# Altium PCB VCU_DV.PcbDoc
Units mm, origin at the board's own origin, x right, y up, seen from the top; angles counter-clockwise.
Board outline 85 x 79.85 mm, 2 copper layers (Top Layer, Bottom Layer); 24 components, 41 nets, 239 pads, 16 vias.
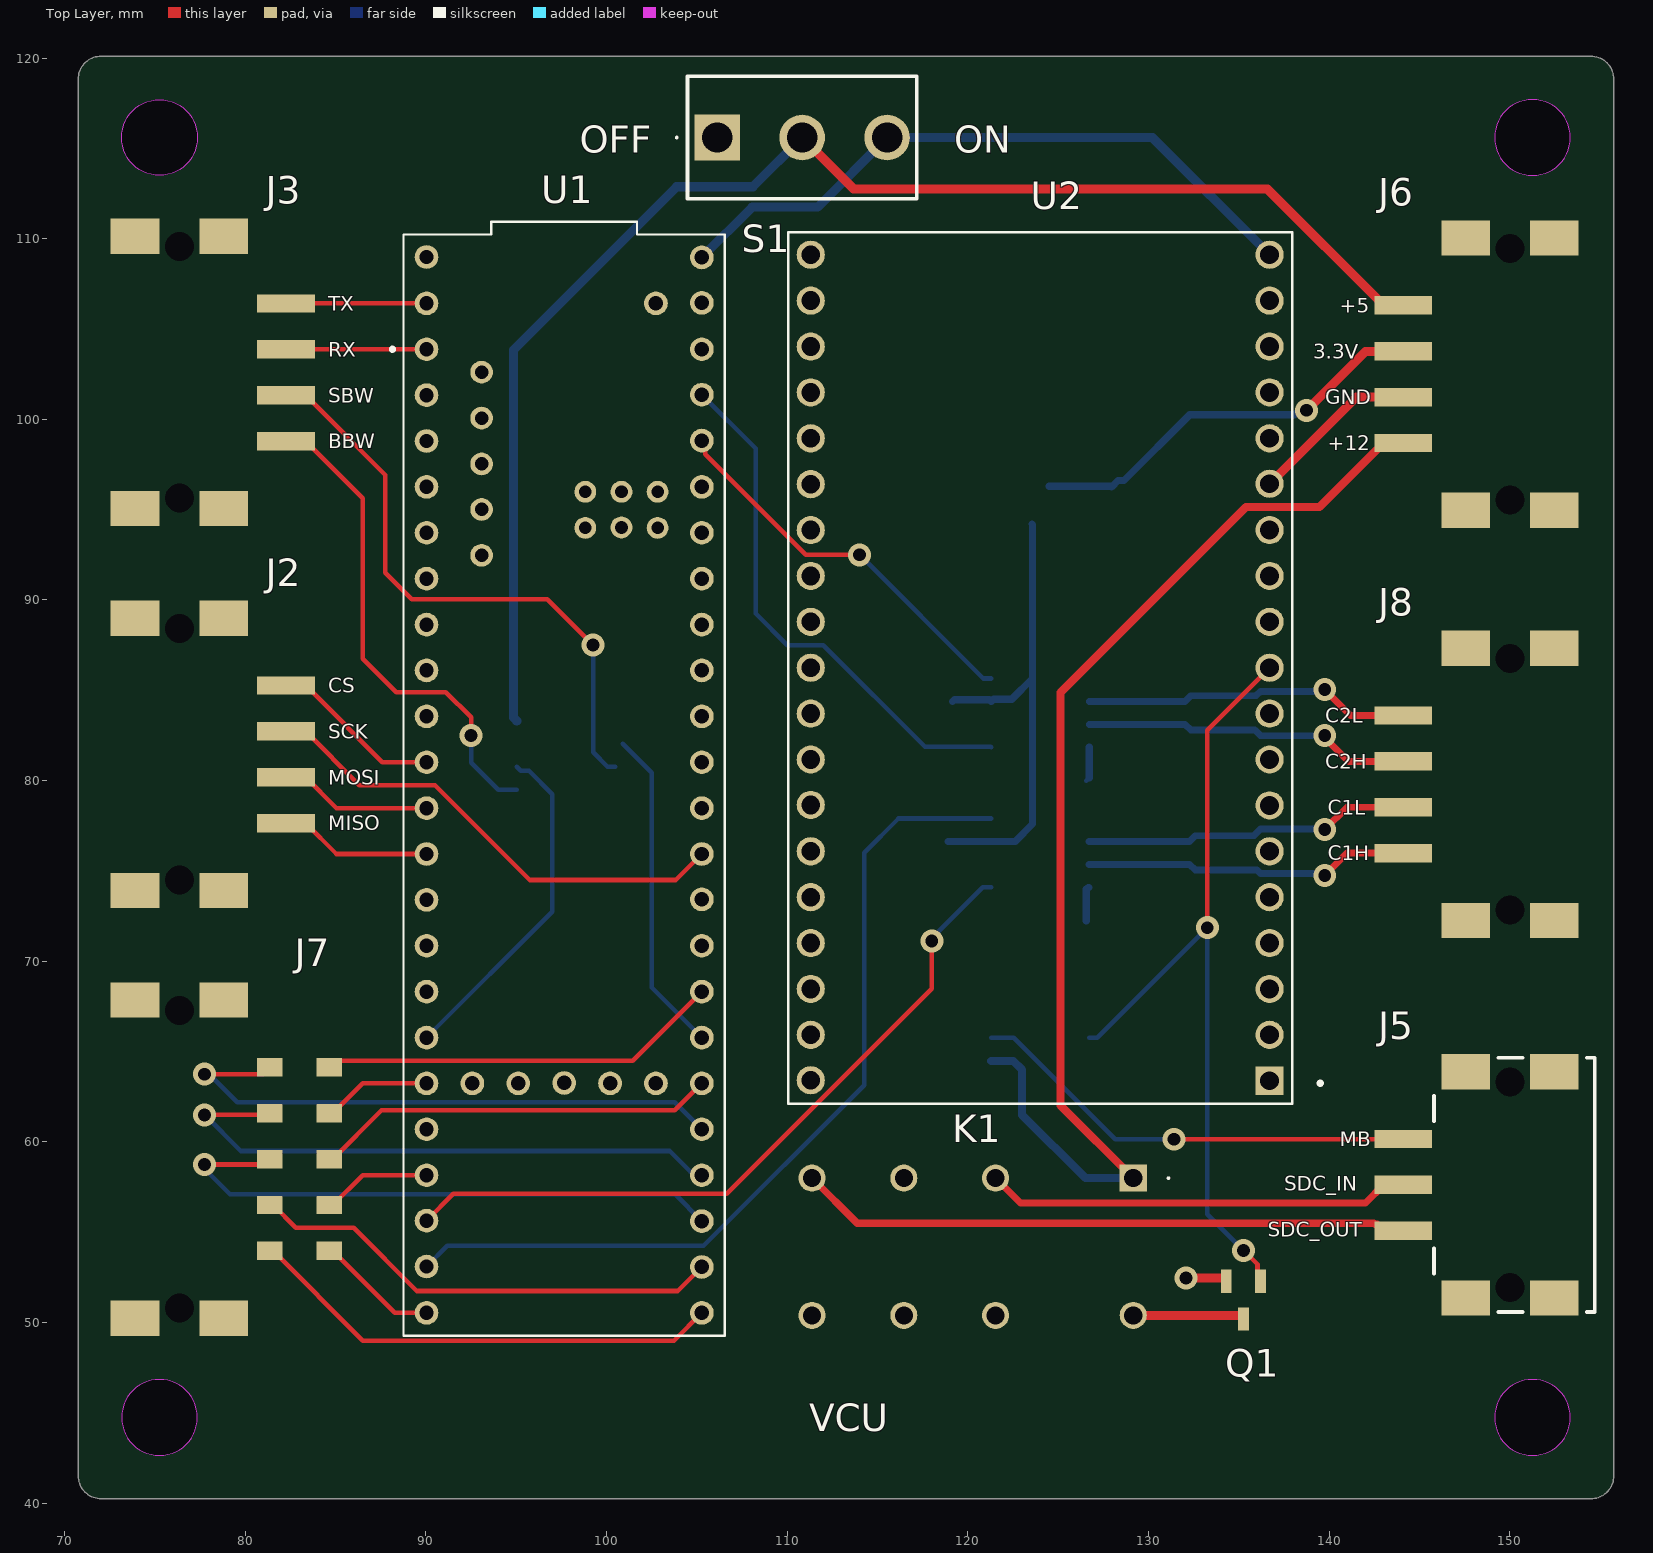
[diagram p0: Top Layer view]
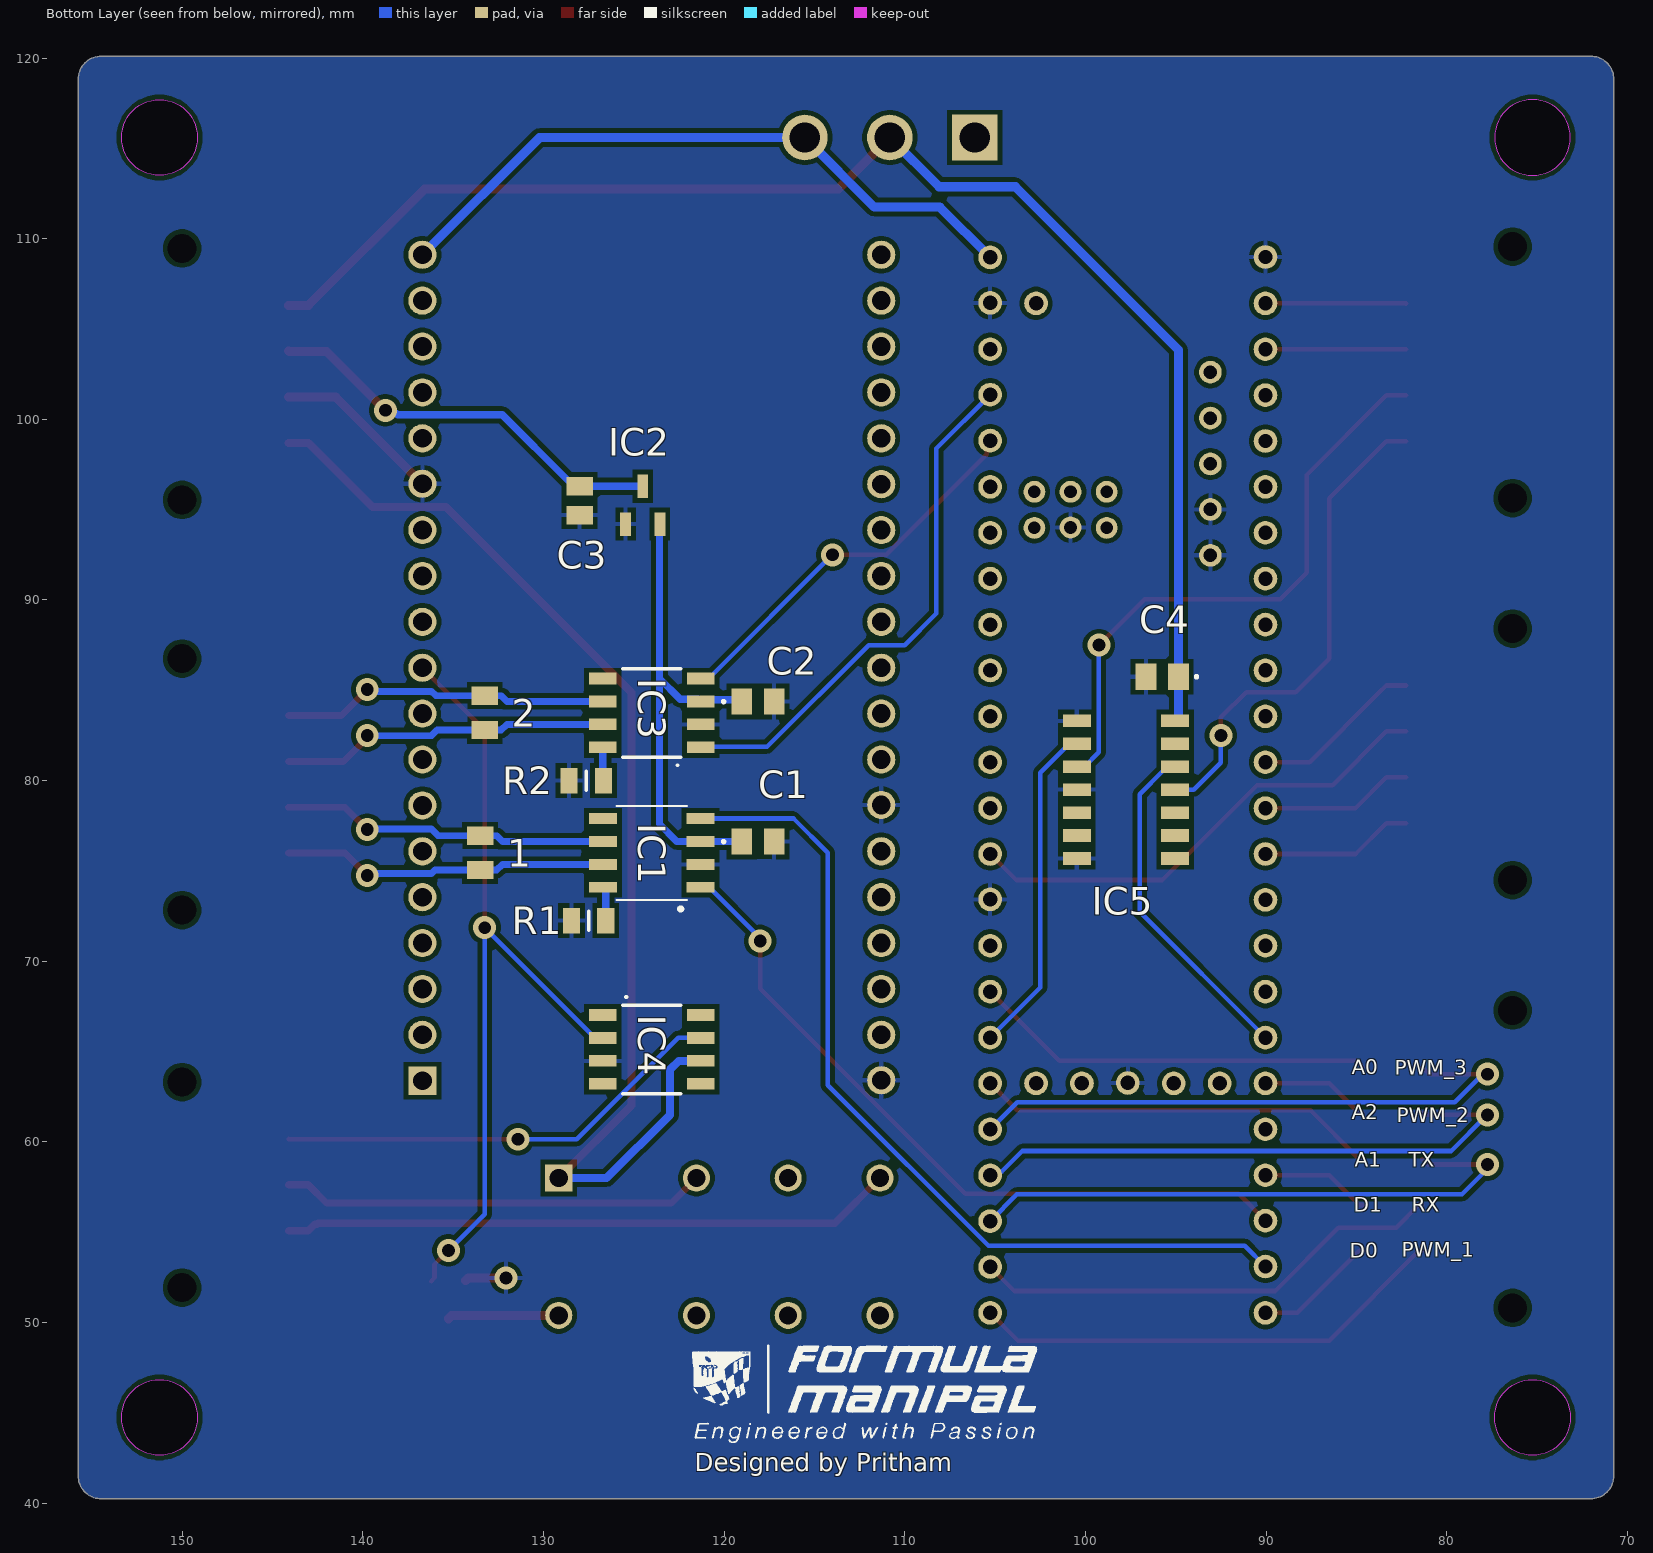
[diagram p1: Bottom Layer view, seen from below]
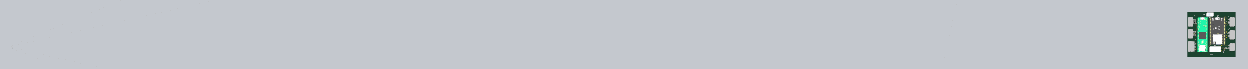
[diagram p2: 3D render of the assembled board from above, using the file's embedded part models]
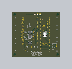
[diagram p3: 3D render of the assembled board from below, using the file's embedded part models]

## Layer stack, top to bottom
Top Solder: solder mask 0.0102, Solder Resist, Dk 3.5
Top Layer: signal copper 0.0356
Dielectric 1: dielectric 0.32, FR-4, Dk 4.8
Bottom Layer: signal copper 0.0356
Bottom Solder: solder mask 0.0102, Solder Resist, Dk 3.5

## Board outline
70.75,113.73 70.75,118.9 70.75,118.83 cw(c72.02,118.83) 72.02,120.1 154.48,120.1 cw(c154.48,118.83) 155.75,118.83 155.75,113.73 155.75,41.5 155.75,41.52 cw(c154.48,41.52) 154.48,40.25 72.02,40.25 cw(c72.02,41.52) 70.75,41.52 70.75,41.5
cut-out: 149.15,44.75 ccw(c151.25,44.75) 151.25,42.65 ccw(c151.25,44.75) 153.35,44.75 ccw(c151.25,44.75) 151.25,46.85 ccw(c151.25,44.75)
cut-out: 73.15,44.75 ccw(c75.25,44.75) 75.25,42.65 ccw(c75.25,44.75) 77.35,44.75 ccw(c75.25,44.75) 75.25,46.85 ccw(c75.25,44.75)
cut-out: 149.15,115.6 ccw(c151.25,115.6) 151.25,113.5 ccw(c151.25,115.6) 153.35,115.6 ccw(c151.25,115.6) 151.25,117.7 ccw(c151.25,115.6)
cut-out: 75.25,113.5 cw(c75.25,115.6) 73.15,115.6 cw(c75.25,115.6) 75.25,117.7 cw(c75.25,115.6) 77.35,115.6 cw(c75.25,115.6)

## Design rules (kind name [scope] priority, off if disabled: settings)
Clearance [All] p1: gap=0.254 ignorepadtopadclearanceinfootprint=FALSE except(0.305: Arc-Via Track-Via)
DiffPairsRouting [All] p1: maxlimit=0.254 minlimit=0.254 mostfreqgap=0.254 toplayer_minwidth=0.381 toplayer_maxwidth=0.381 toplayer_prefwidth=0.381 bottomlayer_minwidth=0.381 bottomlayer_maxwidth=0.381 bottomlayer_prefwidth=0.381 maxuncoupledlength=12.7
HoleSize [All] p1: absolutevalues=TRUE maxlimit=6.3 minlimit=0.35 maxpercent=80.000 minpercent=20.000
PolygonConnect [All] p1: connectstyle=Relief reliefconductorwidth=0.254 reliefentries=4 polygonreliefangle="90 Angle" airgapwidth=0.254
RoutingVias [All] p1: holewidth=0.711 width=1.27 viastyle="Through Hole" minholewidth=0.711 minwidth=1.27 maxholewidth=0.711 maxwidth=1.27
SolderMaskExpansion [All] p1: expansion=0.102 istentingtop=FALSE
SupplyNets "Schematic Supply Nets_3" [InNet('+12')] p1: voltage=0.000
SupplyNets "Schematic Supply Nets_1" [InNet('GND')] p2: voltage=0.000
SupplyNets "Schematic Supply Nets" [InNet('+5')] p3: voltage=0.000
UnRoutedNet [All] p1: checkbadconnections=TRUE
Width [All] p1: maxlimit=1 minlimit=0.254 preferedwidth=0.254 minimp=50.000000 maximp=50.000000 favimp=50.000000
27 further rules are at their usual default settings.

## Classes and differential pairs
differential pair CAN2: +CAN2_P -CAN2_N
differential pair CAN1: +CAN1_P -CAN1_N

## Components (designator, comment, footprint, x,y, rotation, side; value= is the part's Value field where it differs from the comment)
1 "TNPW0805120RBEEA" RESC2012X55N 133.5,76 r270 bottom
2 "TNPW0805120RBEEA" RESC2012X55N 133.25,83.75 r270 bottom
C1 "C0805C104J5RACTU" C0805 118.125,76.625 r180 bottom
C2 "C0805C104J5RACTU" C0805 118.125,84.375 r180 bottom
C3 "CC0805KKX5R8BB105" CAPC2012X145N 128,95.5 r270 bottom
C4 "C0805C104J5RACTU" C0805 95.75,85.75 r0 bottom
IC1 "TCAN332D" TCAN332D 124,76 r0 bottom
IC2 "MCP1700T-3302E_TT" SOT95P237X112-3N 124.5,95.25 r90 bottom
IC3 "SN65HVD230DRG4" SOIC127P600X175-8N 124,83.75 r0 bottom
IC4 "TC4426ACOA713" SOIC127P600X175-8N 124,65.125 r180 bottom
IC5 "74AHCT125D-Q100,11" SOIC127P600X175-14N 97.75,79.5 r180 bottom
J2 "384472-E" 384472E 77.75,81.456 r90 top
J3 "384472-E" 384472E 77.75,102.6 r90 top
J5 "284052-E" 284052E 150,57.625 r270 top
J6 "384472-E" 384472E 148.6,102.5 r270 top
J7 "474016-E" 474016E 78.15,59.05 r270 top
J8 "384472-E" 384472E 148.6,79.795 r270 top
K1 "SR11-12V-200-2C" SR1112V2002C 129.15,58 r180 top
Q1 "SI2392BDS-T1-GE3" SOT95P237X112-3N 135.25,51.25 r270 top
R1 "RC0805FR-0710KL" RESC2012X60N 127.5,72.25 r0 bottom
R2 "RC0805FR-0710KL" RESC2012X60N 127.625,80 r0 bottom
S1 "SLW-1276864-4A-D" SLW12768644AD 106.125,115.6 r0 top
U1 "DEV-16771" MODULE_DEV-16771 97.65,79.75 r270 top
U2 "ESP32-DEVKITC-32UE" ESPRESSIF_ESP32-DEVKITC-32UE 124,86.25 r180 top

## Footprints (in the part's own frame and the unit in brackets; to place one, negate y for a bottom-side part, rotate by r counter-clockwise, add the part's x,y. Pads: shape width x height; smd on the part's side, far side on the other; paste and mask are expansions set on the pad)
284052E [mm]
  rect 1.02x3.2 smd: A1(2.54,-5.9) A2(0,-5.9) A3(-2.54,-5.9)
  round 0.8 hole 1.6 unplated: MH1(5.69,0) MH2(-5.69,0)
  rect 1.95x2.7 smd: MP1(6.265,-2.45) MP2(-6.265,-2.45) MP3(6.265,2.45) MP4(-6.265,2.45)
  silkscreen extent -7.04,-4.2 7.04,4.7, body extent -7.04,-7.5 7.04,4.7, height 4.93
384472E [mm]
  rect 1.95x2.7 smd: 1(7.535,-1.05) 2(-7.535,-1.05) 3(7.535,3.85) 4(-7.535,3.85)
  round 0.8 hole 1.6 unplated: 5(6.96,1.4) 6(-6.96,1.4)
  rect 1.02x3.2 smd: A1(3.81,-4.5) A2(1.27,-4.5) A3(-1.27,-4.5) A4(-3.81,-4.5)
  body extent -8.31,-6.1 8.31,6.1, height 5.14
474016E [mm]
  rect 1.02x1.4 smd: A1(5.08,3.2) A2(2.54,3.2) A3(0,3.2) A4(-2.54,3.2) A5(-5.08,3.2) B1(5.08,6.5) B2(2.54,6.5) B3(0,6.5) B4(-2.54,6.5) B5(-5.08,6.5)
  round 0.8 hole 1.6 unplated: MH1(8.23,-1.8) MH2(-8.23,-1.8)
  rect 1.95x2.7 smd: MP1(8.805,0.65) MP2(-8.805,0.65) MP3(8.805,-4.25) MP4(-8.805,-4.25)
  body extent -9.58,-6.5 9.58,7.2, height 8.2
C0805 [mm]
  rect 1.15x1.45 smd: 1(-0.9,0) 2(0.9,0)
  silkscreen extent -1.95,-0.05 -1.85,0.05, body extent -1.15,-0.78 1.15,0.77, height 0.98
CAPC2012X145N [mm]
  rect 1.02x1.47 smd: 1(-0.8,0) 2(0.8,0)
  body extent -1,-0.63 1,0.63, height 0.7
ESPRESSIF_ESP32-DEVKITC-32UE [mm]
  rect 1.56x1.56 / inner round 1.56 / far side rect 1.56x1.56 hole 1.04: 1(-12.7,22.86)
  round 1.56 hole 1.04: 2(-12.7,20.32) 3(-12.7,17.78) 4(-12.7,15.24) 5(-12.7,12.7) 6(-12.7,10.16) 7(-12.7,7.62) 8(-12.7,5.08) 9(-12.7,2.54) 10(-12.7,0) 11(-12.7,-2.54) 12(-12.7,-5.08) 13(-12.7,-7.62) 14(-12.7,-10.185) 15(-12.7,-12.7) 16(-12.7,-15.24) 17(-12.7,-17.78) 18(-12.7,-20.32) 19(-12.7,-22.86) 20(12.7,22.835) 21(12.7,20.32) 22(12.7,17.78) 23(12.7,15.24) 24(12.7,12.7) 25(12.7,10.16) 26(12.7,7.595) 27(12.7,5.08) 28(12.7,2.54) 29(12.7,0) 30(12.7,-2.54) 31(12.7,-5.08) 32(12.7,-7.62) 33(12.7,-10.16) 34(12.7,-12.7) 35(12.7,-15.24) 36(12.7,-17.78) 37(12.7,-20.32) 38(12.7,-22.86)
  silkscreen extent -15.6,-24.1 13.95,24.13, body extent -13.95,-24.62 13.95,24.13, height 7.85
MODULE_DEV-16771 [mm]
  round 1.308 hole 0.8: 0(-26.67,-7.62) 1(-24.13,-7.62) 2(-21.59,-7.62) 3(-19.05,-7.62) 3.3V_1(6.35,-7.62) 3.3V_2(-24.13,7.62) 3.3V_3(16.51,-2.54) 4(-16.51,-7.62) 5(-13.97,-7.62) 6(-11.43,-7.62) 7(-8.89,-7.62) 8(-6.35,-7.62) 9(-3.81,-7.62) 10(-1.27,-7.62) 11(1.27,-7.62) 12(3.81,-7.62) 13(3.81,7.62) 14(1.27,7.62) 15(-1.27,7.62) 16(-3.81,7.62) 17(-6.35,7.62) 18(-8.89,7.62) 19(-11.43,7.62) 20(-13.97,7.62) 21(-16.51,7.62) 22(-19.075,7.62) 23(-21.615,7.62) 24(8.89,-7.62) 25(11.43,-7.62) 26(13.97,-7.62) 27(16.51,-7.62) 28(19.05,-7.62) 29(21.59,-7.62) 30(24.105,-7.62) 31(26.645,-7.62) 32(29.21,-7.62) 33(29.21,7.62) 34(26.67,7.62) 35(24.13,7.62) 36(21.59,7.62) 37(19.05,7.62) 38(16.51,7.62) 39(13.97,7.62) 40(11.43,7.62) 41(8.89,7.62) GND1(-29.235,-7.62) GND2(6.325,7.62) GND3(-26.695,7.62) GND4(16.485,0) ON/OFF(16.51,5.08) PROGRAM(16.51,2.54) VBAT(16.51,-5.08) VIN(-29.21,7.62) VUSB(-26.67,5.08)
  round 1.258 hole 0.75: 5V(-22.86,-4.57) D+(-17.78,-4.57) D-(-20.32,-4.57) USB_GND1(-15.265,-4.57) USB_GND2(-12.725,-4.57)
  round 1.208 hole 0.7: GND5(-14.265,3.17) LED(-16.24,3.17) R+(-16.24,5.17) R-(-14.24,5.17) T+(-14.24,1.17) T-(-16.24,1.17)
  silkscreen extent -31.18,-9.6 30.48,8.89, body extent -31.18,-8.89 30.48,8.89, height 7.15
RESC2012X55N [mm]
  rect 1x1.45 smd: 1(-0.95,0) 2(0.95,0)
  body extent -1,-0.63 1,0.63, height 0.55
RESC2012X60N [mm]
  rect 0.95x1.4 smd: 1(-0.95,0) 2(0.95,0)
  silkscreen extent 0,-0.53 0,0.53, body extent -1,-0.63 1,0.63, height 0.6
SLW12768644AD [mm]
  rect 2.52x2.52 hole 1.68: 1(0,0)
  round 2.52 hole 1.68: 2(4.7,0) 3(9.4,0)
  silkscreen extent -2.3,-3.4 11.05,3.4, body extent -1.65,-3.4 11.05,3.2, height 12.34
SOIC127P600X175-8N [mm]
  rect 1.525x0.65 smd: 1(-2.712,1.905) 2(-2.712,0.635) 3(-2.712,-0.635) 4(-2.712,-1.905) 5(2.712,-1.905) 6(2.712,-0.635) 7(2.712,0.635) 8(2.712,1.905)
  silkscreen extent -1.6,-2.45 1.6,2.9, body extent -3,-2.45 3,2.45, height 1.75
SOIC127P600X175-14N [mm]
  rect 1.55x0.7 smd: 1(-2.725,3.81) 2(-2.725,2.54) 3(-2.725,1.27) 4(-2.725,0) 5(-2.725,-1.27) 6(-2.725,-2.54) 7(-2.725,-3.81) 8(2.725,-3.81) 9(2.725,-2.54) 10(2.725,-1.27) 11(2.725,0) 12(2.725,1.27) 13(2.725,2.54) 14(2.725,3.81)
  body extent -3,-4.31 3,4.34, height 1.56
SOT95P237X112-3N [mm]
  rect 1.3x0.6 smd: 1(-1.05,0.95) 2(-1.05,-0.95) 3(1.05,0)
  body extent -1.32,-1.52 1.32,1.52, height 1.12
SR1112V2002C [mm]
  rect 1.5x1.5 hole 1: 1(0,0)
  round 1.5 hole 1: 2(7.62,0) 3(12.7,0) 4(17.78,0) 5(17.78,7.6) 6(12.7,7.6) 7(7.62,7.6) 8(0,7.6)
  silkscreen extent -2,-0.05 -1.9,0.05, body extent -1.26,-1.14 19.04,8.76, height 11.1
TCAN332D [mm]
  rect 1.55x0.6 smd: 1(-2.7,1.905) 2(-2.7,0.635) 3(-2.7,-0.635) 4(-2.7,-1.905) 5(2.7,-1.905) 6(2.7,-0.635) 7(2.7,0.635) 8(2.7,1.905)
  silkscreen extent -1.95,-2.6 1.95,3.2, body extent -1.95,-2.45 1.95,2.45, height 1.85

## Part data
1 2: "Resistor", Manufacturer_Name=Vishay, Mouser Part Number=71-TNPW0805120RBEEA, Datasheet Link=https://www.vishay.com/docs/28758/tnpw_e3.pdf, Height=0.55mm, Manufacturer_Part_Number=TNPW0805120RBEEA, Mouser Price/Stock=https://www.mouser.co.uk/ProductDetail/Vishay-Dale/TNPW0805120RBEEA?qs=dafR6q3Fy0xDQ4ZX6i4Bqw%3D%3D
C1 C2 C4: "Capacitor", Manufacturer_Name="Yageo Group", Mouser Part Number=80-C0805C104J5R, Arrow Part Number=C0805C104J5RACTU, Arrow Price/Stock=https://www.arrow.com/en/products/c0805c104j5ractu/kemet-corporation?utm_currency=USD&region=nac, Datasheet Link=https://www.yageogroup.com/content/datasheet/asset/file/KEM_C1002_X7R_SMD, Height=1.1mm, Manufacturer_Part_Number=C0805C104J5RACTU, Mouser Price/Stock=https://www.mouser.co.uk/ProductDetail/KEMET/C0805C104J5RACTU?qs=gbgtKHXraGH15GhoNPXHBg%3D%3D
C3: "Capacitor", Manufacturer_Name="Yageo Group", Mouser Part Number=603-CC805KKX5R8BB105, Arrow Part Number=CC0805KKX5R8BB105, Arrow Price/Stock=https://www.arrow.com/en/products/cc0805kkx5r8bb105/yageo?region=nac, Datasheet Link=https://www.mouser.cn/datasheet/2/447/yago_s_a0011397150_1-2286655.pdf, Height=1.45mm, Manufacturer_Part_Number=CC0805KKX5R8BB105, Mouser Price/Stock=https://www.mouser.co.uk/ProductDetail/YAGEO/CC0805KKX5R8BB105?qs=57cj7OiSijk1%252BH2OVk7C4Q%3D%3D
IC1: "Integrated Circuit", Manufacturer_Name="Texas Instruments", Mouser Part Number=595-TCAN332D, Arrow Part Number=TCAN332D, Arrow Price/Stock=https://www.arrow.com/en/products/tcan332d/texas-instruments?utm_currency=USD&region=nac, Datasheet Link=http://www.ti.com/lit/gpn/tcan332, Height=1.75mm, Manufacturer_Part_Number=TCAN332D, Mouser Price/Stock=https://www.mouser.co.uk/ProductDetail/Texas-Instruments/TCAN332D?qs=n%252BTO0c4TDSa%252BardrC1RUcw%3D%3D
IC2: "Integrated Circuit", Arrow Part Number=MCP1700T-3302E/TT, Manufacturer_Name=Microchip, Mouser Part Number=579-MCP1700T3302E/TT, Arrow Price/Stock=https://www.arrow.com/en/products/mcp1700t-3302ett/microchip-technology.html?utm_currency=USD&region=nac, Datasheet Link=https://datasheet.datasheetarchive.com/originals/distributors/SFDatasheet-4/sf-00090030.pdf, Height=1.12mm, Manufacturer_Part_Number=MCP1700T-3302E/TT, Mouser Price/Stock=https://www.mouser.co.uk/ProductDetail/Microchip-Technology/MCP1700T-3302E-TT?qs=fM4xO01eazPmCNDrdHEdaw%3D%3D
IC3: "Integrated Circuit", Manufacturer_Name="Texas Instruments", Mouser Part Number=595-SN65HVD230DRG4, Arrow Part Number=SN65HVD230DRG4, Arrow Price/Stock=https://www.arrow.com/en/products/sn65hvd230drg4/texas-instruments?utm_currency=USD&region=nac, Datasheet Link=http://www.ti.com/general/docs/suppproductinfo.tsp?distId=10&gotoUrl=http%3A%2F%2Fwww.ti.com%2Flit%2Fgpn%2Fsn65hvd230, Height=1.75mm, Manufacturer_Part_Number=SN65HVD230DRG4, Mouser Price/Stock=https://www.mouser.co.uk/ProductDetail/Texas-Instruments/SN65HVD230DRG4?qs=QViXGNcIEAvg9uZlAursSA%3D%3D
IC4: "Integrated Circuit", Manufacturer_Name=Microchip, Mouser Part Number=579-TC4426ACOA713, Arrow Part Number=TC4426ACOA713, Arrow Price/Stock=https://www.arrow.com/en/products/tc4426acoa713/microchip-technology?utm_currency=USD&region=nac, Datasheet Link=http://www.microchip.com/mymicrochip/filehandler.aspx?ddocname=en011753, Height=1.75mm, Manufacturer_Part_Number=TC4426ACOA713, Mouser Price/Stock=https://www.mouser.co.uk/ProductDetail/Microchip-Technology/TC4426ACOA713?qs=Y8sGFBEOzV8BTCfZE2iYhg%3D%3D
IC5: "Integrated Circuit", Manufacturer_Name=Nexperia, Mouser Part Number=771-74AHCT100D-Q100, Datasheet Link=https://assets.nexperia.com/documents/data-sheet/74AHC_AHCT125_Q100.pdf, Height=1.75mm, Manufacturer_Part_Number=74AHCT125D-Q100,11, Mouser Price/Stock=https://www.mouser.co.uk/ProductDetail/Nexperia/74AHCT125D-Q10011?qs=1sbE9T7hb3aFwEqQIQqpKg%3D%3D
J2 J3 J6 J8: "Connector", Manufacturer_Name="TE Connectivity", Datasheet Link=https://www.te.com/en/product-384472-E.html, Height=5.05mm, Manufacturer_Part_Number=384472-E
J5: "Connector", Manufacturer_Name="TE Connectivity", Mouser Part Number=305-284052, Arrow Part Number=284052-E, Arrow Price/Stock=https://www.arrow.com/en/products/284052-e/te-connectivity?utm_currency=USD&region=nac, Datasheet Link=https://www.te.com/commerce/DocumentDelivery/DDEController?Action=showdoc&DocId=Customer+Drawing%7F224919-E%7FE%7Fpdf%7FEnglish%7FENG_CD_224919-E_E.pdf%7F284052-E, Height=5.05mm, Manufacturer_Part_Number=284052-E, Mouser Price/Stock=https://www.mouser.co.uk/ProductDetail/TE-Connectivity-ERNI/284052-E?qs=t7xnP681wgU7xBo%252Bl2asHw%3D%3D
J7: "Connector", Manufacturer_Name="TE Connectivity", Mouser Part Number=305-474016, Datasheet Link=https://www.te.com/commerce/DocumentDelivery/DDEController?Action=showdoc&DocId=Customer+Drawing%7F324229-E-C%7FB1%7Fpdf%7FGerman%7FGER_CD_324229-E-C_B1.pdf%7F474016-E, Height=7.99mm, Manufacturer_Part_Number=474016-E, Mouser Price/Stock=https://www.mouser.co.uk/ProductDetail/TE-Connectivity-ERNI/474016-E?qs=t7xnP681wgWap0JGLzibsA%3D%3D
K1: "Relay or Contactor", Manufacturer_Name="Same Sky", Mouser Part Number=179-SR11-12V-200-2C, Arrow Part Number=SR11-12V-200-2C, Arrow Price/Stock=https://www.arrow.com/en/products/sr11-12v-200-2c/cui-devices?utm_currency=USD&region=nac, Datasheet Link=https://www.sameskydevices.com/product/resource/SR11-12V-200-2C.pdf, Height=11.7mm, Manufacturer_Part_Number=SR11-12V-200-2C, Mouser Price/Stock=https://www.mouser.co.uk/ProductDetail/Same-Sky/SR11-12V-200-2C?qs=4ASt3YYao0UxXttxhS7S7A%3D%3D
Q1: "MOSFET (N-Channel)", Manufacturer_Name=Vishay, Mouser Part Number=78-SI2392BDS, Arrow Part Number=SI2392BDS-T1-GE3, Arrow Price/Stock=https://www.arrow.com/en/products/si2392bds-t1-ge3/vishay?region=nac, Datasheet Link=https://www.vishay.com/docs/62133/si2392bds.pdf, Height=1.12mm, Manufacturer_Part_Number=SI2392BDS-T1-GE3, Mouser Price/Stock=https://www.mouser.co.uk/ProductDetail/Vishay-Siliconix/SI2392BDS-T1-GE3?qs=9vOqFld9vZU3PmPFM7QVvw%3D%3D
R1 R2: "Resistor", Manufacturer_Name="Yageo Group", Mouser Part Number=603-RC0805FR-0710KL, Arrow Part Number=RC0805FR-0710KL, Arrow Price/Stock=https://www.arrow.com/en/products/rc0805fr-0710kl/yageo.html?utm_currency=USD&region=europe, Datasheet Link=https://www.yageo.com/upload/media/product/productsearch/datasheet/rchip/PYu-RC_Group_51_RoHS_L_11.pdf, Height=0.6mm, Manufacturer_Part_Number=RC0805FR-0710KL, Mouser Price/Stock=https://www.mouser.co.uk/ProductDetail/YAGEO/RC0805FR-0710KL?qs=7bY8808IzHq6vrU3BeiiYw%3D%3D
S1: "Switch", Manufacturer_Name="Same Sky", Mouser Part Number=179-SLW-1276864-4A-D, Arrow Part Number=SLW-1276864-4A-D, Arrow Price/Stock=https://www.arrow.com/en/products/slw-1276864-4a-d/cui-devices.html?utm_currency=USD&region=nac, Datasheet Link=https://www.sameskydevices.com/product/resource/slw-1276864-4a-d.pdf, Height=10.6mm, Manufacturer_Part_Number=SLW-1276864-4A-D, Mouser Price/Stock=https://www.mouser.co.uk/ProductDetail/Same-Sky/SLW-1276864-4A-D?qs=1Kr7Jg1SGW90vOt02EYiag%3D%3D
U1: "RT1062 Teensy 4.1 series ARM® Cortex®-M7 MPU Embedded Evaluation Board", Package=None, Check_prices=https://www.snapeda.com/parts/DEV-16771/SparkFun+Electronics/view-part/?ref=eda, MF="SparkFun Electronics", MP=DEV-16771, SnapEDA_Link=https://www.snapeda.com/parts/DEV-16771/SparkFun+Electronics/view-part/?ref=snap
U2: "The ESP32-DEVKITC-32UE evaluation board from Espressif Systems is designed for seamless wireless connectivity in IoT applications. Powered by the ESP32-WROOM-32UE module, it supports dual-mode BluetoothÂ® Smart Ready 4.x and 802.11 b/g/n Wi-Fi at 2.4GHz.", Package="CUSTOM-38 ESPRESSIF", Check_prices=https://www.snapeda.com/parts/ESP32-DEVKITC-32UE/Espressif+Systems/view-part/?ref=eda, MF="Espressif Systems", MP=ESP32-DEVKITC-32UE, SnapEDA_Link=https://www.snapeda.com/parts/ESP32-DEVKITC-32UE/Espressif+Systems/view-part/?ref=snap

## Via types
v1: diameter 1.27, hole 0.711, Top Layer to Bottom Layer, 16 vias

## Nets (pads, with @x,y where several pads share a name; then routed paths per layer and width w, separated by ;. In a path a pad name is that pad's centre, name@x,y a point inside that pad or via, vN(x,y) a via of type N, cw(c..) or ccw(c..) an arc to the next point about the centre after c; other vN are vias at no path point)
3.3v: C3.1 IC2.3 J6.A3 | length 22.8
  Top Layer w0.5: v1(138.75,100.5) 142,103.75 144.08,103.75 J6.A3
  Bottom Layer w0.4: IC2.3 C3.1 ; C3.1@127.95,96.25 C3.1 ; v1(138.75,100.5) 138.584,100.334 138.164,100.334 138.081,100.25 132.275,100.25 128.635,96.61 128.31,96.61 C3.1
5V: S1.3 U1.VIN U2.19 | length 36.9
  Bottom Layer w0.5: U1.VIN 108.06,111.75 111.675,111.75 S1.3 130.21,115.6 U2.19
+5: C4.1 IC5.14 J6.A4 S1.2 | length 78.6
  Top Layer w0.5: S1.2 113.675,112.75 136.57,112.75 143.01,106.31 J6.A4
  Bottom Layer w0.5: IC5.14 94.85,83.485 C4.1 94.85,103.85 103.875,112.875 108.1,112.875 S1.2
+12: IC4.6 J6.A1 K1.1 | length 65.3
  Top Layer w0.45: K1.1 125.125,62.025 125.125,84.875 135.4,95.15 139.47,95.15 143.01,98.69 J6.A1
  Bottom Layer w0.45: IC4.6 122.51,64.49 123,64 123,61.5 126.5,58 K1.1
A0: J7.B5 U1.40 | length 22.4
  Top Layer w0.254: J7.B5 85.02,64.5 101.45,64.5 U1.40
A1: J7.B3 U1.38 | length 22.4
  Top Layer w0.254: J7.B3 84.84,59.05 87.54,61.75 103.78,61.75 U1.38
A2: J7.B4 U1.27 | length 6.1
  Top Layer w0.254: J7.B4 84.84,61.59 86.49,63.24 U1.27
BBW: IC5.12 U1.26 | length 19
  Bottom Layer w0.254: U1.26 97,72.75 97,79.25 95.703,80.547 95.248,80.547 IC5.12
BBW_OUT: IC5.11 J3.A4 | length 27.4
  Top Layer w0.254: J3.A4 83.34,98.79 86.5,95.63 86.5,86.75 88.35,84.9 91.1,84.9 92.5,83.5 v1(92.5,82.5)
  Bottom Layer w0.254: v1(92.5,82.5) 92.5,81 94,79.5 IC5.11
CAN1_N: 1.1 IC1.6 J8.A2 | length 18.2
  Top Layer w0.381: v1(139.75,77.29) 140.985,78.525 J8.A2
  Bottom Layer w0.381: IC1.6 132.269,76.635 132.584,76.95 1.1 135.828,76.95 136.193,77.315 139.725,77.315 v1(139.75,77.29)
CAN1_P: 1.2 IC1.7 J8.A1 | length 18.2
  Top Layer w0.381: v1(139.75,74.75) 140.985,75.985 J8.A1
  Bottom Layer w0.381: IC1.7 132.269,75.365 132.584,75.05 1.2 136.008,75.05 136.193,74.866 139.634,74.866 v1(139.75,74.75)
CAN2_N: 2.1 IC3.6 J8.A4 | length 18.3
  Top Layer w0.381: v1(139.75,85.04) 141.185,83.605 J8.A4
  Bottom Layer w0.381: IC3.6 132.019,84.385 132.335,84.7 2.1 135.958,84.7 136.193,84.935 139.645,84.935 v1(139.75,85.04)
CAN2_P: 2.2 IC3.7 J8.A3 | length 18.3
  Top Layer w0.381: v1(139.75,82.5) 139.75,82.391 141.076,81.065 J8.A3
  Bottom Layer w0.381: IC3.7 132.019,83.115 132.335,82.8 2.2 135.878,82.8 136.193,82.486 139.736,82.486 v1(139.75,82.5)
CRX1: IC1.4 U1.31 | length 49.1
  Bottom Layer w0.254: U1.31 91.174,54.249 105.363,54.249 114.25,63.136 114.25,76 116.155,77.905 IC1.4
CRX2: IC3.4 U1.22 | length 21.8
  Top Layer w0.254: U1.22 105.464,98.63 105.464,98.064 111.028,92.5 v1(114,92.5)
  Bottom Layer w0.254: v1(114,92.5) 114.005,92.5 120.85,85.655 IC3.4
CS: J2.A1 U1.10 | length 9.5
  Top Layer w0.254: J2.A1 83.34,85.266 83.723,84.883 87.586,81.02 U1.10
CTX1: IC1.1 U1.30 | length 40.6
  Top Layer w0.254: U1.30 91.51,57.125 106.652,57.125 118,68.473 v1(118,71.125)
  Bottom Layer w0.254: v1(118,71.125) 118,71.27 120.825,74.095 IC1.1
CTX2: IC3.1 U1.23 | length 29.5
  Bottom Layer w0.254: U1.23 108.25,98.385 108.25,89.25 110,87.5 112,87.5 117.625,81.875 121.258,81.875 IC3.1
D0: J7.B1 U1.32 | length 6.8
  Top Layer w0.254: J7.B1 84.84,53.97 88.27,50.54 U1.32
D1: J7.B2 U1.29 | length 6.1
  Top Layer w0.254: J7.B2 84.84,56.51 86.49,58.16 U1.29
DASHRX: J3.A2 U1.1 | length 7.8
  Top Layer w0.254: J3.A2 82.26,103.88 U1.1
DASHTX: J3.A1 U1.0 | length 7.8
  Top Layer w0.254: J3.A1 82.26,106.42 U1.0
GND: C1.2 C2.2 C3.2 C4.2 IC1.2 IC2.1 IC3.2 IC4.3 IC5.1 IC5.4 IC5.7 J6.A2 Q1.2 R1.2 R2.2 U1.GND1 U1.GND2 U1.GND3 U1.GND4 U1.GND5 U1.USB_GND1 U1.USB_GND2 U2.14 U2.20 U2.26 | length 11.7
  Top Layer w0.5: v1(132.07,52.477) 134.148,52.477 Q1.2@134.3,52.325 ; U2.14 141.495,101.23 J6.A2
MB: IC4.7 J5.A3 | length 25.1
  Top Layer w0.254: v1(131.41,60.15) 144.085,60.15 J5.A3
  Bottom Layer w0.254: IC4.7 122.546,65.76 128.156,60.15 v1(131.41,60.15)
MISO: J2.A4 U1.12 | length 8.5
  Top Layer w0.254: J2.A4 83.34,77.646 85.046,75.94 U1.12
MOSI: J2.A3 U1.11 | length 8.5
  Top Layer w0.254: J2.A3 83.34,80.186 85.046,78.48 U1.11
NetC1_1: C1.1 C2.1 IC1.3 IC2.2 IC3.3 | length 26.7
  Bottom Layer w0.4: C1.1@118.9,76.625 118.91,76.635 IC1.3 122.615,76.635 123.577,77.597 123.577,85.659 ; C2.1@119.15,84.375 119.25,84.475 121.198,84.475 IC3.3 121.408,84.505 122.423,84.505 123.577,85.659 ; IC2.2 123.577,94.173 123.577,85.659
NetIC1_8: IC1.8 R1.1 | length 1.9
  Bottom Layer w0.381: IC1.8@126.55,73.986 126.659,74.095 IC1.8
  Bottom Layer w0.4: R1.1 IC1.8@126.55,73.986
NetIC3_8: IC3.8 R2.1 | length 1.9
  Bottom Layer w0.254: R2.1@126.55,80 R2.1@126.712,80.162
  Bottom Layer w0.4: R2.1@126.712,80.162 IC3.8
NetK1_8: K1.8 Q1.3 | length 6.2
  Top Layer w0.5: K1.8 135.077,50.4 135.25,50.227 Q1.3
PWM_1: J7.A1 U1.33 | length 26.6
  Top Layer w0.254: J7.A1 81.54,53.97 86.51,49 103.73,49 U1.33
PWM_2: J7.A4 U1.36 | length 32.5
  Top Layer w0.254: v1(77.75,61.5) 81.26,61.5 J7.A4
  Bottom Layer w0.254: v1(77.75,61.5) 79.75,59.5 103.5,59.5 104.638,58.362 105.068,58.362 U1.36
PWM_3: J7.A5 U1.37 | length 32.6
  Top Layer w0.254: v1(77.75,63.75) 80.97,63.75 J7.A5
  Bottom Layer w0.254: v1@77.75,64 79.545,62.205 103.765,62.205 U1.37
RX: J7.A2 U1.34 | length 26.4
  Top Layer w0.254: J7.A2 81.54,56.51 82.8,55.25 86,55.25 89.5,51.75 103.94,51.75 U1.34
SBW: IC5.2 U1.39 | length 18.1
  Bottom Layer w0.254: IC5.2@100.9,82.04 102.5,80.44 102.5,68.55 U1.39
SBW_OUT: IC5.3 J3.A3 | length 33.4
  Top Layer w0.254: J3.A3 83.34,101.33 87.75,96.92 87.75,91.5 89.208,90.042 96.708,90.042 v1(99.25,87.5)
  Bottom Layer w0.254: v1(99.25,87.5) 99.25,81.57 100.05,80.77 IC5.3
SCK: J2.A2 U1.13 | length 27
  Top Layer w0.254: J2.A2 83.34,82.726 86.316,79.75 90.5,79.75 95.75,74.5 103.83,74.5 U1.13
"SDC sig": IC4.2 Q1.1 U2.10 | length 45.7
  Top Layer w0.254: v1(133.25,71.86) 133.25,82.8 U2.10 ; v1(135.25,54) 136.027,53.223 136.027,52.473 Q1.1
  Bottom Layer w0.254: IC4.2 127.15,65.76 v1(133.25,71.86) 133.25,56 v1(135.25,54)
SDC_IN: J5.A2 K1.2 | length 23.6
  Top Layer w0.4: K1.2 122.905,56.625 142.01,56.625 143.01,57.625 J5.A2
SDC_OUT: J5.A1 K1.4 | length 33.9
  Top Layer w0.4: K1.4 113.87,55.5 142.474,55.5 142.531,55.443 142.652,55.443 143.01,55.085 J5.A1
TX: J7.A3 U1.35 | length 32.7
  Top Layer w0.254: v1(77.75,58.75) 81.05,58.75 J7.A3
  Bottom Layer w0.254: v1(77.75,58.75) 77.75,58.5 79.15,57.1 103.79,57.1 U1.35
pads on no net: IC1.5 IC3.5 IC4.1 IC4.4 IC4.5 IC4.8 IC5.5 IC5.6 IC5.8 IC5.9 IC5.10 IC5.13 J2.1 J2.2 J2.3 J2.4 J2.5 J2.6 J3.1 J3.2 J3.3 J3.4 J3.5 J3.6 J5.MH1 J5.MH2 J5.MP1 J5.MP2 J5.MP3 J5.MP4 J6.1 J6.2 J6.3 J6.4 J6.5 J6.6 J7.MH1 J7.MH2 J7.MP1 J7.MP2 J7.MP3 J7.MP4 J8.1 J8.2 J8.3 J8.4 J8.5 J8.6 K1.3 K1.5 K1.6 K1.7 S1.1 U1.2 U1.3 U1.3.3V_1 U1.3.3V_2 U1.3.3V_3 U1.4 U1.5 U1.5V U1.6 U1.7 U1.8 U1.9 U1.14 U1.15 U1.16 U1.17 U1.18 U1.19 U1.20 U1.21 U1.24 U1.25 U1.28 U1.41 U1.D+ U1.D- U1.LED U1.ON/OFF U1.PROGRAM U1.R+ U1.R- U1.T+ U1.T- U1.VBAT U1.VUSB U2.1 U2.2 U2.3 U2.4 U2.5 U2.6 U2.7 U2.8 U2.9 U2.11 U2.12 U2.13 U2.15 U2.16 U2.17 U2.18 U2.21 U2.22 U2.23 U2.24 U2.25 U2.27 U2.28 U2.29 U2.30 U2.31 U2.32 U2.33 U2.34 U2.35 U2.36 U2.37 U2.38

## Polygon pours and split planes (outlines as drawn)
GND on Bottom Layer "GND_L02_P002" (solid, pour order 2): 70.75,113.73 70.75,118.9 70.75,118.83 cw(c72.02,118.83) 72.02,120.1 154.48,120.1 cw(c154.48,118.83) 155.75,118.83 155.75,113.73 155.75,41.5 155.75,41.52 cw(c154.48,41.52) 154.48,40.25 72.02,40.25 cw(c72.02,41.52) 70.75,41.52 70.75,41.5

## Silkscreen, mask and mechanical layers (free items; w line width, h text height)
Top Overlay:
  text "OFF" at 98.504,114.754 h1.5
  text "ON" at 119.254,114.754 h1.5
  text "TX" at 84.6,106.02 h0.8
  text "+5" at 140.583,105.91 h0.8
  text "RX" at 84.6,103.475 h0.8
  text "3.3V" at 139.117,103.36 h0.8
  text "SBW" at 84.6,100.93 h0.8
  text "GND" at 139.783,100.83 h0.8
  text "BBW" at 84.6,98.39 h0.8
  text "+12" at 139.916,98.29 h0.8
  text "CS" at 84.6,84.866 h0.8
  text "C2L" at 139.783,83.205 h0.8
  text "SCK" at 84.6,82.326 h0.8
  text "C2H" at 139.783,80.665 h0.8
  text "MOSI" at 84.6,79.786 h0.8
  text "C1L" at 139.916,78.125 h0.8
  text "MISO" at 84.6,77.246 h0.8
  text "C1H" at 139.916,75.585 h0.8
  text "MB" at 140.583,59.75 h0.8
  text "SDC_IN" at 137.517,57.292 h0.8
  text "SDC_OUT" at 136.584,54.752 h0.8
  text "VCU" at 111.219,43.988 h1.52
Bottom Overlay:
  drawing of 46 lines, arcs and shapes, not listed
  text "A0" at 85.246,63.754 h0.8
  text "PWM_3" at 82.871,63.732 h0.8
  text "A2" at 85.246,61.254 h0.8
  text "PWM_2" at 82.765,61.098 h0.8
  text "TX" at 82.088,58.616 h0.8
  text "A1" at 85.092,58.616 h0.8
  text "RX" at 81.946,56.125 h0.8
  text "D1" at 85.149,56.125 h0.8
  text "PWM_1" at 82.496,53.637 h0.8
  text "D0" at 85.363,53.598 h0.8
  text "Designed by Pritham" at 121.63,41.767 h1
Mechanical 1:
  circle w0.254: c151.25,44.75 r2.1
  circle w0.254: c151.25,44.75 r3.5
  circle w0.254: c75.25,44.75 r3.5
  circle w0.254: c75.25,44.75 r2.1
  circle w0.254: c151.25,115.6 r2.1
  circle w0.254: c151.25,115.6 r3.5
  circle w0.254: c75.25,115.6 r3.5
  circle w0.254: c75.25,115.6 r2.1
  lines w0.254: 70.75,41.5 70.75,113.73 70.75,118.9 ; 70.75,41.52 ccw(c72.02,41.52) 72.02,40.25 154.48,40.25 ccw(c154.48,41.52) 155.75,41.52 ; 70.75,117.83 ccw(c70.75,117.83) 70.75,117.83 ; 70.75,118.83 cw(c72.02,118.83) 72.02,120.1 77.52,120.1 154.48,120.1 cw(c154.48,118.83) 155.75,118.83 155.75,113.73 155.75,41.5

## Text inside footprints (layer, text, board x,y; h text height)
U1: Mechanical 13 "Teensy 4.1" at 97.99,80 h1.27 r270